# EAGLE board 05-eagleClass-555-board-outline (EAGLE 8.1.1)

Size 100 x 80 mm. Coordinates in mm from the lower left corner, seen from the top.
Outline: 0,0 100,0 100,80 0,80 0,0
Copper layers (1*16): Top 0.035mm / dielectric 1.5mm / Bottom 0.035mm
Design rules "default": minimum track width 10mil, minimum drill 24mil, track to track 8mil, track to pad 8mil, pad to pad 8mil, via to via 8mil, smd to smd 8mil, copper to edge 40mil, drill to drill 8mil, minimum pad ring 10mil, minimum via ring 8mil, stop-mask expansion 4mil, vias tented up to drill 0mil, thermal gap 10mil

## Footprints (pad centres in the part's own frame; a part is rotated, then mirrored left to right if it is on the bottom)
AXIAL-5MM = drill 0.9 pad 1.88: P$1 -2.5,0; P$2 2.5,0
LED5MM = drill 0.813 pad 1.88: A -1.27,0; K 1.27,0
DIL-08 = drill 0.813 long: 1 -3.81,-3.81; 2 -1.27,-3.81; 3 1.27,-3.81; 4 3.81,-3.81; 5 3.81,3.81; 6 1.27,3.81; 7 -1.27,3.81; 8 -3.81,3.81
AXIAL-0.3EZ = drill 0.9 pad 1.88: P$1 -3.81,0; P$2 3.81,0
CR2032-THRU = drill 2 pad 3.81 octagon: +1 -10.668,0; +2 10.668,0 | smd 10.16 x 10.16: - 0,0

## Placement (x,y rotation side)
C1  1UF  [AXIAL-5MM]  21.59,52.07 270 top
D4  WHITE-30mA  [LED5MM]  39.37,27.94 180 top
IC1  NE555  [DIL-08]  29.21,53.34 180 top
R4  100  [AXIAL-0.3EZ]  48.26,27.94 180 top
R5  1K  [AXIAL-0.3EZ]  31.75,45.72 0 top
R6  470K  [AXIAL-0.3EZ]  21.59,45.72 180 top
U$1  [CR2032-THRU]  22.86,33.02 180 top
U$2  [CR2032-THRU]  48.26,39.37 0 top

## Library data of the parts
C1 = SparkFun-Capacitors; PROD_ID: 445-8517-ND
D4 = SparkFun-LED; PROD_ID: 67-2062-ND
IC1 = st-microelectronics; MF: Arrow Electronics; MPN: NE555N; OC_FARNELL: 1467742; OC_NEWARK: 89K1486; PROD_ID: 296-1857-5-ND
R4 R6 = SparkFun-Resistors; PROD_ID: RES-08380
R5 = SparkFun-Resistors; PROD_ID: 1.0KQBK-ND
U$1 U$2 = adafruit

## Nets
DISCHARGE: IC1.7 R5.P$1 R6.P$1
GND: C1.P$1 D4.K IC1.1 U$1.-
N$2: D4.A R4.P$2
N$3: IC1.2
N$4: U$1.+1 U$1.+2 U$2.-
OUT: IC1.3 R4.P$1
THRESHOLD: C1.P$2 IC1.6 R6.P$2
VCC: IC1.4 IC1.8 R5.P$2 U$2.+1

## Tracks (layer width: path | path; a pad name or v marks a point on that pad's centre or on a via)
DISCHARGE  (2 unrouted)
GND  (3 unrouted)
N$2  (1 unrouted)
N$4  (2 unrouted)
OUT  (1 unrouted)
THRESHOLD  (2 unrouted)
VCC  (3 unrouted)